# Altium PCB DoserController (2).PcbDoc
Units mm, origin at the board's own origin, x right, y up, seen from the top; angles counter-clockwise.
Board outline 46 x 30 mm, 2 copper layers (Top Layer, Bottom Layer); 40 components, 28 nets, 147 pads, 34 vias.
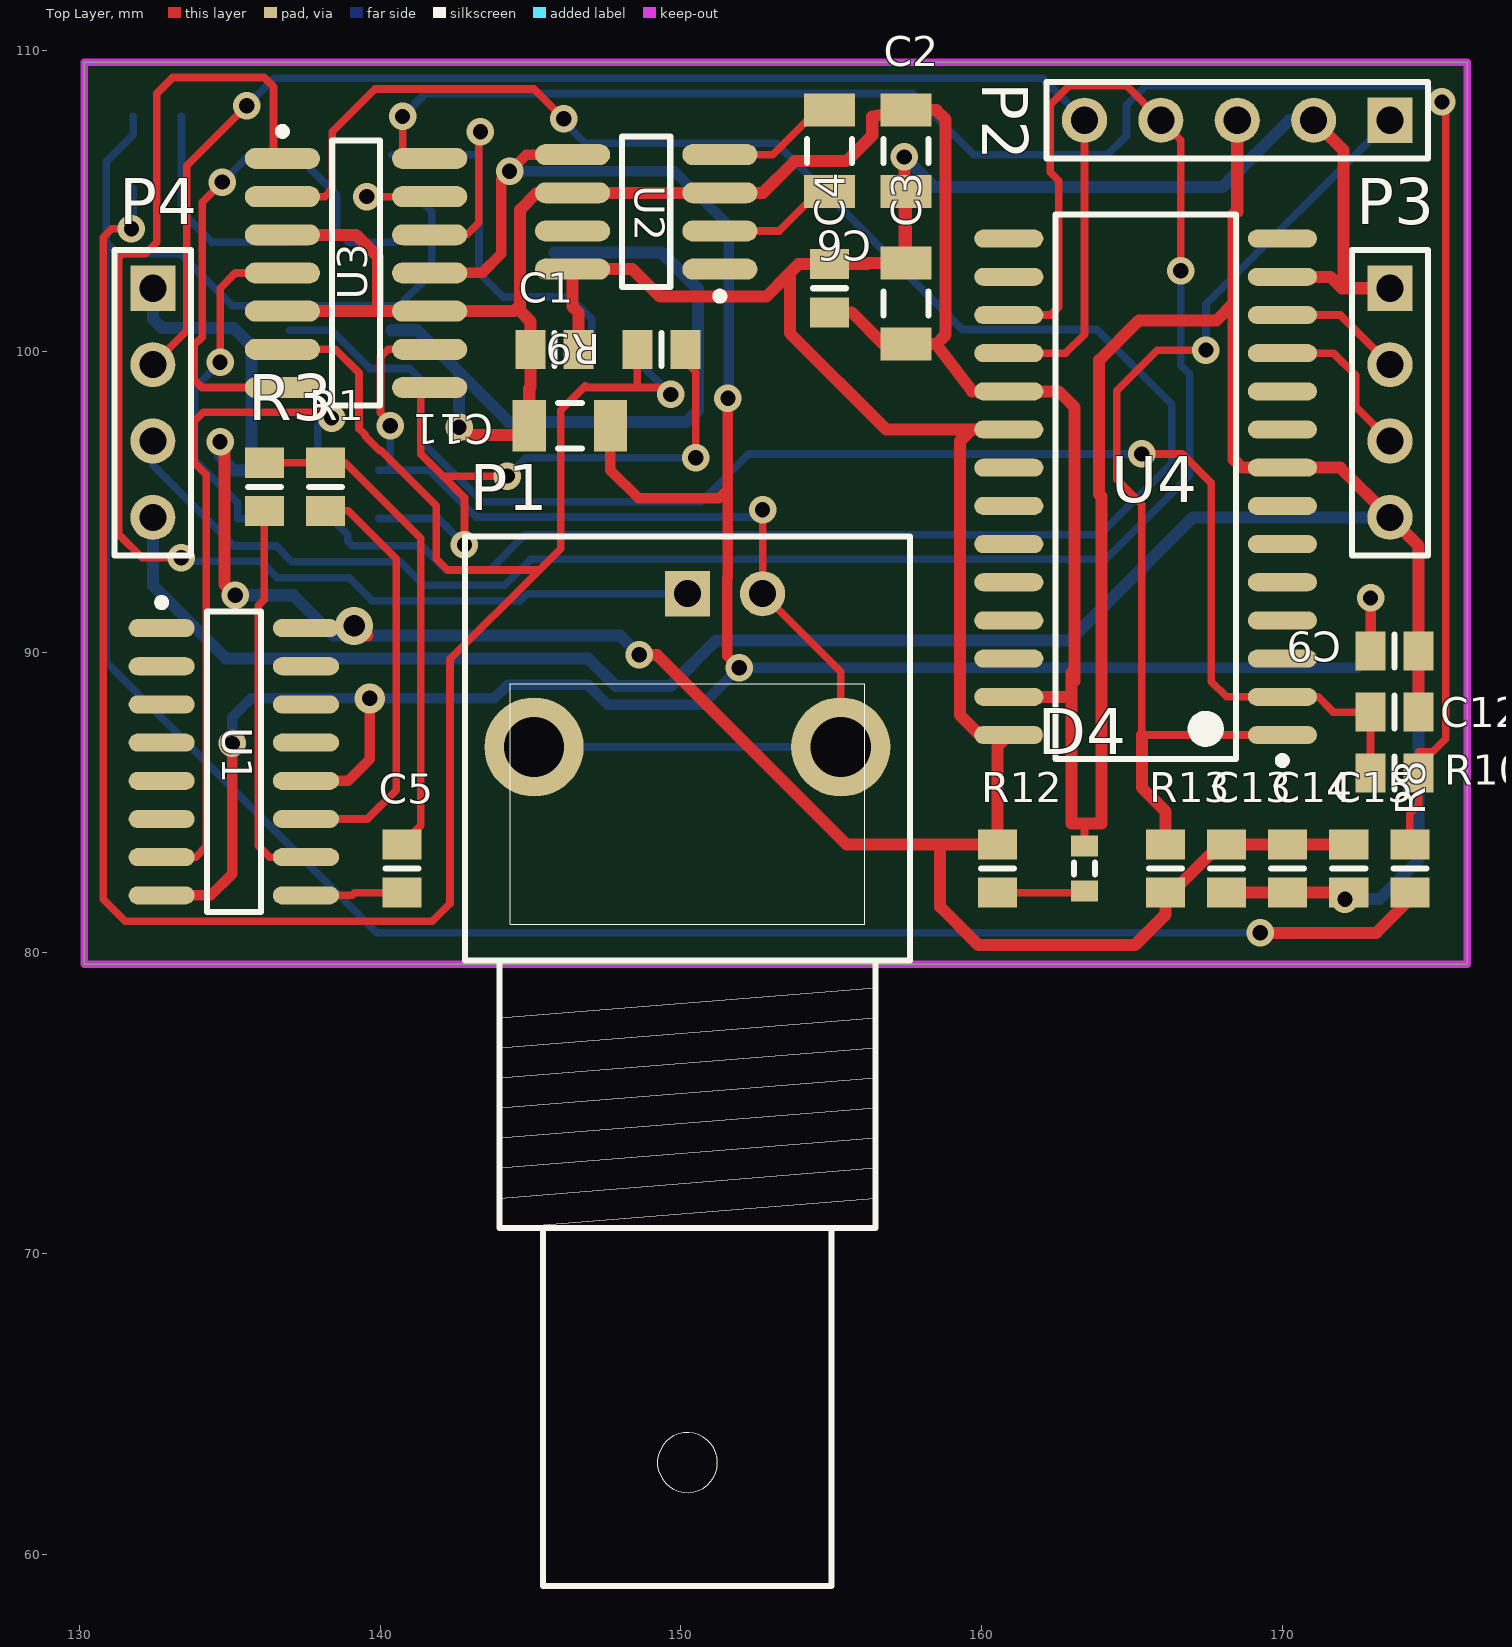
[diagram p0: Top Layer view]
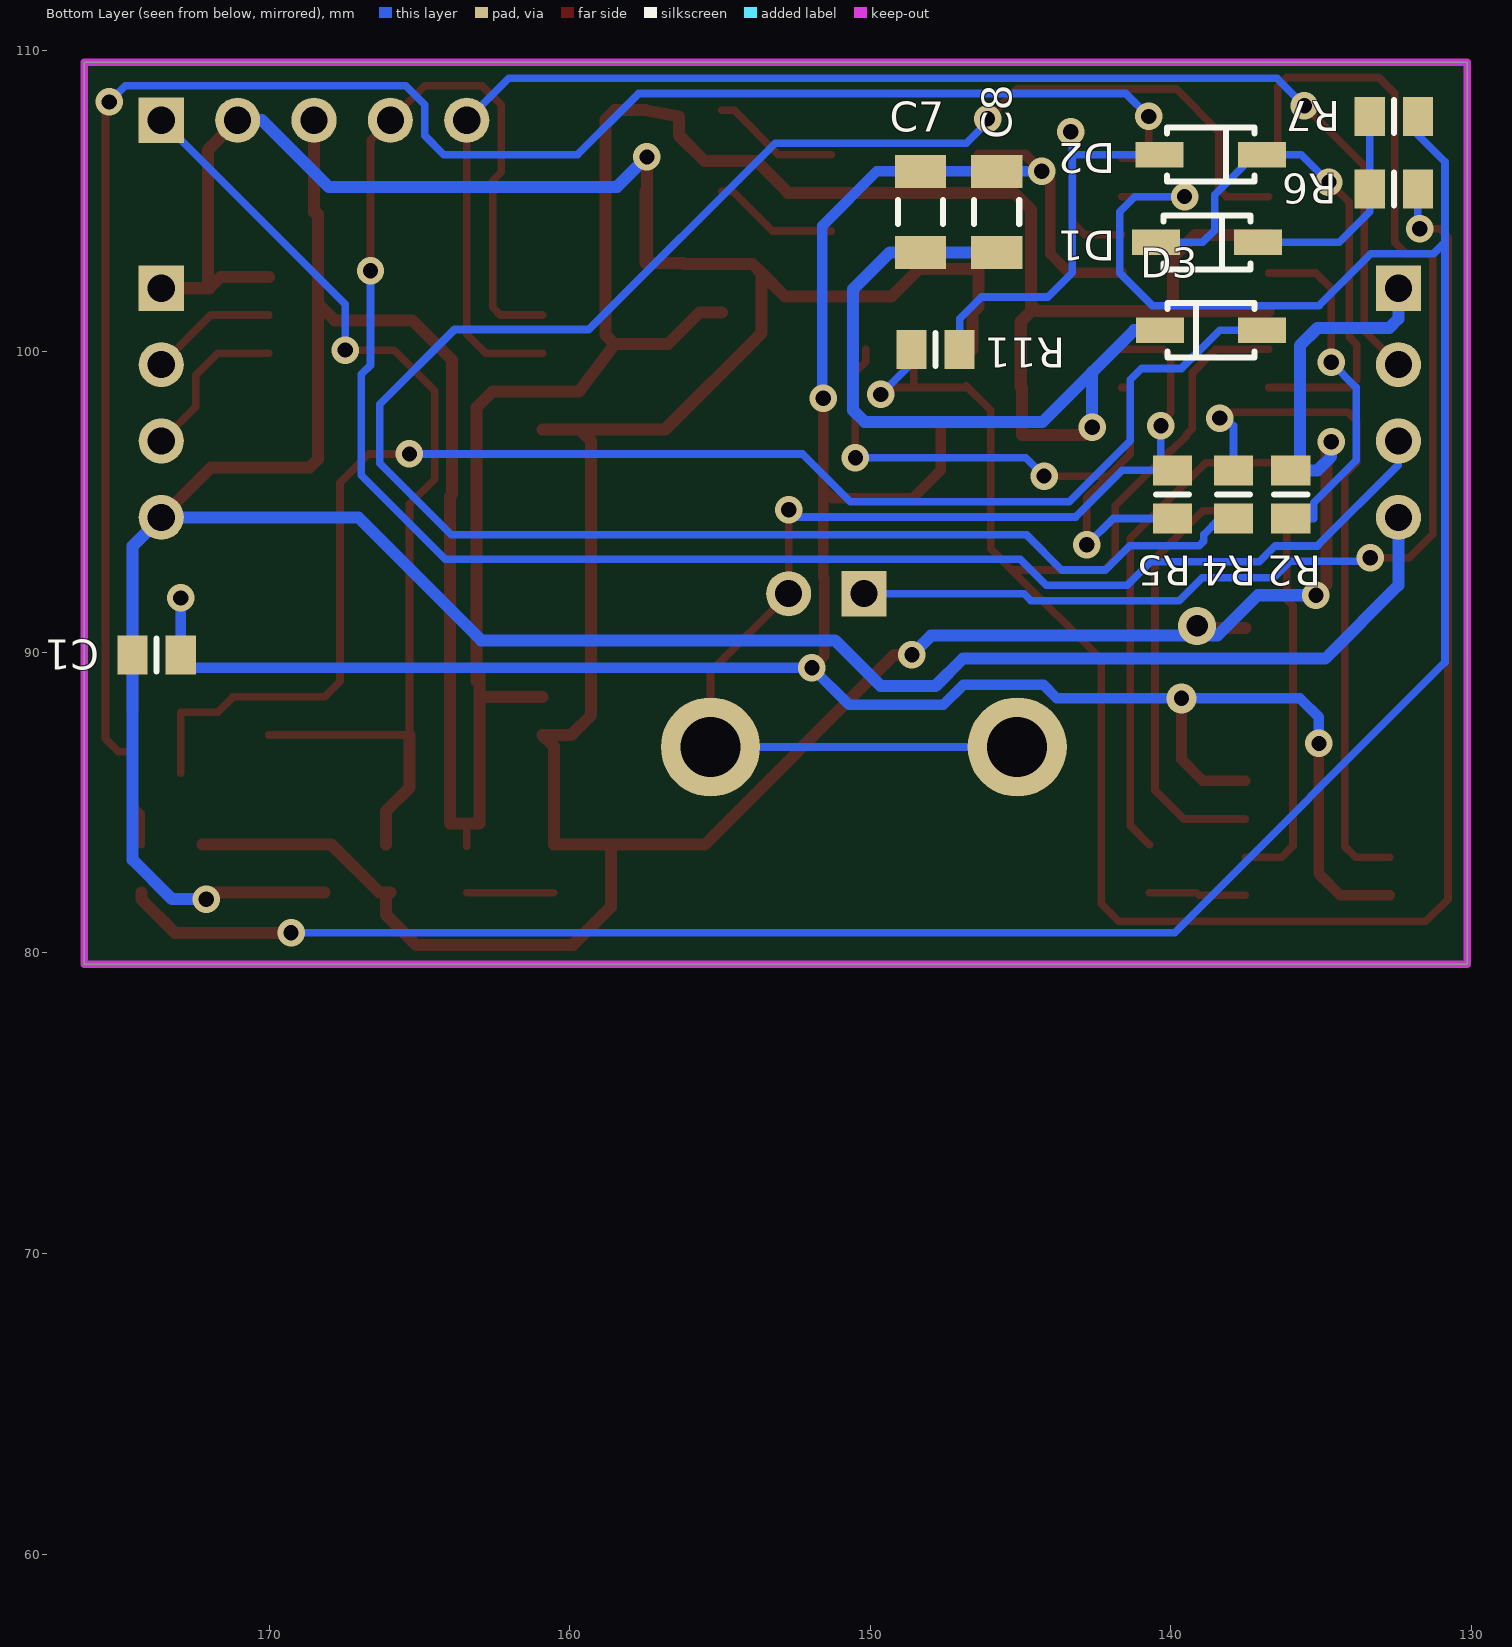
[diagram p1: Bottom Layer view, seen from below]

## Layer stack, top to bottom
Top Layer: signal copper 0.0356
Dielectric: dielectric 0.32, FR-4, Dk 4.8
Bottom Layer: signal copper 0.0356

## Board outline
130.149,109.629 176.149,109.629 176.149,79.629 130.149,79.629

## Design rules (kind name [scope] priority, off if disabled: settings)
Clearance Clearance_Board_Keepout [OnLayer('KeepOutLayer')] p1: gap=0.508
Clearance Minimum_pad_component_clearcance [(InPadClass('All Pads') AND InComponentClass('All Components')) vs (InPadClass('All Pads') AND InComponentClass('All Components'))] p2: gap=0.178
Clearance Clearance_DiffPairRouting [(IsTrack AND InDifferentialPairClass('All Differential Pairs')) vs (IsTrack AND InDifferentialPairClass('All Differential Pairs'))] p3: gap=0.203
Clearance Clearance_Via_Pad [(IsVia) vs (IsPad)] p4: gap=0.381
Clearance Clearance_Via_Via [(IsVia) vs (IsVia)] p5: gap=0.381
Clearance Clearance_wara_Default [All] p6: gap=0.254
Clearance [All] p7: gap=0.254
PolygonConnect [All] p1: connectstyle=Relief reliefconductorwidth=0.254 reliefentries=4 polygonreliefangle="90 Angle"
RoomDefinition Sheet1 [InComponentClass('Sheet1')] p1: confinementstyle=ConfineIn formatcopy=TRUE lockcomponents=FALSE outline 130.149,79.629 176.149,79.629 176.149,109.629 130.149,109.629
RoomDefinition ECCircuit [InComponentClass('ECCircuit')] p2: confinementstyle=ConfineIn formatcopy=TRUE lockcomponents=FALSE outline 176.149,79.629 176.149,109.629 130.149,109.629 130.149,79.629
RoutingVias [All] p1: holewidth=0.508 width=0.914 viastyle="Through Hole" minholewidth=0.508 minwidth=0.914 maxholewidth=0.711 maxwidth=1.27
SilkscreenOverComponentPads [All] p1: minsilkscreentomaskgap=0.254
SolderMaskExpansion [All] p1: expansion=0.102
Width +5isoec [InNet('+5VISOEC')] p1: maxlimit=2 minlimit=0.3 preferedwidth=0.4 minimp=50.000000 maximp=50.000000 favimp=50.000000
Width -5isoec [InNet('-5VISOEC')] p2: maxlimit=2 minlimit=0.35 preferedwidth=0.4 minimp=50.000000 maximp=50.000000 favimp=50.000000
Width GND2 [InNet('GND2')] p3: maxlimit=5 minlimit=0.254 preferedwidth=0.4 minimp=50.000000 maximp=50.000000 favimp=50.000000
27 further rules are at their usual default settings.

## Classes and differential pairs
component class Sheet1: C13 C14 C15 D4 P2 P3 P4 R12 R13 U4
component class ECCircuit: C1 C2 C3 C4 C5 C6 C7 C8 C9 C10 C11 C12 D1 D2 D3 P1 R1 R2 R3 R4 R5 R6 R7 R8 R9 R10 R11 R? U1 U2 U3

## Components (designator, comment, footprint, x,y, rotation, side; value= is the part's Value field where it differs from the comment)
C1 "Cap" RESC2012L 145.796,100.076 r180 top
C2 "Cap Pol1" CAPC3216L 157.48,106.68 r90 top
C3 "Cap Pol1" CAPC3216L 157.48,101.6 r270 top
C4 "Cap" RESC2012L 154.94,102.108 r270 top
C5 "Cap" RESC2012L 140.716,82.804 r270 top
C6 "Cap Pol1" CAPC3216L 154.94,106.68 r90 top
C7 "Cap Pol1" CAPC3216L 148.336,104.648 r90 bottom
C8 "Cap Pol1" CAPC3216L 145.796,104.648 r90 bottom
C9 "Cap" RESC2012L 173.736,90.043 r180 top
C10 "Cap" RESC2012L 173.736,89.916 r180 bottom
C11 "Cap Pol1" CAPC3216L 146.304,97.536 r0 top
C12 "Cap" RESC2012L 173.736,88.011 r0 top
C13 "Cap" RESC2012L 168.148,82.804 r90 top
C14 "Cap" RESC2012L 170.18,82.804 r90 top
C15 "Cap" RESC2012L 172.212,82.804 r90 top
D1 "Diode 1N4148" SOD123/X.85 138.803,103.632 r0 bottom
D2 "Diode 1N4148" SOD123/X.85 138.676,106.553 r0 bottom
D3 "Diode 1N5819" SOD123/X.85 138.668,100.711 r180 bottom
D4 "LED2" RESC1608L 163.423,82.804 r90 top
P1 "BNC" "BNC_RA CON" 150.215,91.948 r90 top
P2 "Header 5" HDR1X5 173.583,107.696 r180 top
P3 "Header 4" HDR1X4 173.583,102.108 r270 top
P4 "Header 4" HDR1X4 132.435,102.108 r270 top
R1 "Res1" RESC2012L 138.176,95.504 r270 top
R2 "Res1" RESC2012L 136.017,95.25 r90 bottom
R3 "Res1" RESC2012L 136.144,95.504 r270 top
R4 "Res1" RESC2012L 137.922,95.25 r270 bottom
R5 "Res1" RESC2012L 139.954,95.25 r270 bottom
R6 "Res1" RESC2012L 132.588,105.41 r0 bottom
R7 "Res1" RESC2012L 132.588,107.823 r180 bottom
R8 "Res1" RESC2012L 174.244,82.804 r90 top
R9 "Res1" RESC2012L 149.352,100.076 r180 top
R10 "Res1" RESC2012L 173.736,85.979 r180 top
R11 "Res1" RESC2012L 147.828,100.076 r180 bottom
R12 "Res1" RESC2012L 160.528,82.804 r90 top
R13 "Res Semi" RESC2012L 166.116,82.804 r270 top
U1 "CD4060BCM" M16A_N 135.128,86.36 r0 top
U2 "ICL7660S" SOIC127P600-8M 148.844,104.648 r180 top
U3 "TL084BCJ" NSO14_M 139.192,102.616 r0 top
U4 "DSPIC30F2020-30I/SO" SOIC-SO28_N 165.455,95.504 r180 top

## Footprints (in the part's own frame and the unit in brackets; to place one, negate y for a bottom-side part, rotate by r counter-clockwise, add the part's x,y. Pads: shape width x height; smd on the part's side, far side on the other; paste and mask are expansions set on the pad)
"BNC_RA CON" [mm] "Connector; BNC Elbow"
  rect 1.5x1.5 hole 0.9: 1(0,0)
  round 3.3 hole 2: 2(-5.1,-5.1) 2(-5.1,5.1)
  round 1.5 hole 0.9: 2(0,-2.5)
  silkscreen extent -33,-7.4 1.9,7.4
CAPC3216L [mm] "Chip Capacitor, Body 3.2x1.6mm, IPC High Density"
  rect 1.1x1.7 smd: 1(-1.35,0) 2(1.35,0)
  silkscreen extent -0.4,-0.75 0.4,0.75, body extent -1.7,-0.9 1.7,0.9, height 1.3
HDR1X4 [mm] "Connector; Header; 4 Position"
  rect 1.5x1.5 hole 0.9: 1(0,0)
  round 1.5 hole 0.9: 2(2.54,0) 3(5.08,0) 4(7.62,0)
  silkscreen extent -1.27,-1.27 8.89,1.27
HDR1X5 [mm] "Connector; Header; 5 Position"
  rect 1.5x1.5 hole 0.9: 1(0,0)
  round 1.5 hole 0.9: 2(2.54,0) 3(5.08,0) 4(7.62,0) 5(10.16,0)
  silkscreen extent -1.27,-1.27 11.43,1.27
M16A_N [mm] "SOIC, 16-Leads, Body 9.9x3.9mm, Pitch 1.27mm, IPC Medium Density"
  oval 2.2x0.6 smd: 1(-2.4,4.445) 2(-2.4,3.175) 3(-2.4,1.905) 4(-2.4,0.635) 5(-2.4,-0.635) 6(-2.4,-1.905) 7(-2.4,-3.175) 8(-2.4,-4.445) 9(2.4,-4.445) 10(2.4,-3.175) 11(2.4,-1.905) 12(2.4,-0.635) 13(2.4,0.635) 14(2.4,1.905) 15(2.4,3.175) 16(2.4,4.445)
  silkscreen extent -2.52,-5 0.9,5.42, body extent -2,-5 2,5, height 1.75
NSO14_M [mm] "SOIC, 14-Leads, Body 8.7x3.9mm, Pitch 1.27mm, IPC Low Density"
  oval 2.5x0.7 smd: 1(-2.45,3.81) 2(-2.45,2.54) 3(-2.45,1.27) 4(-2.45,0) 5(-2.45,-1.27) 6(-2.45,-2.54) 7(-2.45,-3.81) 8(2.45,-3.81) 9(2.45,-2.54) 10(2.45,-1.27) 11(2.45,0) 12(2.45,1.27) 13(2.45,2.54) 14(2.45,3.81)
  silkscreen extent -2.57,-4.4 0.8,4.83, body extent -2,-4.38 2,4.38, height 1.75
RESC1608L [mm] "Chip Resistor, Body 1.6x0.8mm, IPC High Density"
  rect 0.7x0.9 smd: 1(-0.75,0) 2(0.75,0)
  silkscreen extent -0.2,-0.35 0.2,0.35, body extent -0.85,-0.48 0.85,0.48, height 0.9
RESC2012L [mm] "Chip Resistor, Body 2.0x1.3mm, IPC High Density"
  rect 1x1.3 smd: 1(-0.8,0) 2(0.8,0)
  silkscreen extent 0,-0.55 0,0.55, body extent -1.07,-0.7 1.07,0.7, height 2.54
SOD123/X.85 [mm] "SOD-123; 2 Leads; Body 2.7 x 1.6 mm, (LxW)"
  rect 1.6x0.85 smd: 1(-1.7,0) 2(1.7,0)
  silkscreen extent -1.45,-0.9 1.45,0.9
SOIC127P600-8M [mm] "SOIC, 8-Leads, Body 4.9x3.9mm, Pitch 1.27mm, IPC Low Density"
  oval 2.5x0.7 smd: 1(-2.45,1.905) 2(-2.45,0.635) 3(-2.45,-0.635) 4(-2.45,-1.905) 5(2.45,-1.905) 6(2.45,-0.635) 7(2.45,0.635) 8(2.45,1.905)
  silkscreen extent -2.58,-2.5 0.8,2.93, body extent -2,-2.5 2,2.5, height 1.75
SOIC-SO28_N [mm] "SOIC, 28-Leads, Body 17.9x7.5mm, Pitch 1.27mm, IPC Medium Density"
  oval 2.3x0.6 smd: 1(-4.55,8.255) 2(-4.55,6.985) 3(-4.55,5.715) 4(-4.55,4.445) 5(-4.55,3.175) 6(-4.55,1.905) 7(-4.55,0.635) 8(-4.55,-0.635) 9(-4.55,-1.905) 10(-4.55,-3.175) 11(-4.55,-4.445) 12(-4.55,-5.715) 13(-4.55,-6.985) 14(-4.55,-8.255) 15(4.55,-8.255) 16(4.55,-6.985) 17(4.55,-5.715) 18(4.55,-4.445) 19(4.55,-3.175) 20(4.55,-1.905) 21(4.55,-0.635) 22(4.55,0.635) 23(4.55,1.905) 24(4.55,3.175) 25(4.55,4.445) 26(4.55,5.715) 27(4.55,6.985) 28(4.55,8.255)
  silkscreen extent -4.67,-9.05 3,9.23, body extent -3.8,-9.06 3.8,9.06, height 2.65

## Part data
C1 C4 C5 C9 C10 C12 C13 C14 C15: "Capacitor"
C2 C3 C6 C7 C8 C11: "Polarized Capacitor (Radial)"
D1 D2: "High Conductance Fast Diode"
D3: library part "Diode 1N4001", "1 Amp General Purpose Rectifier"
D4: "Typical RED, GREEN, YELLOW, AMBER GaAs LED"
P1: "BNC Elbow Connector"
P2: "Header, 5-Pin"
P3 P4: "Header, 4-Pin"
R1 R2 R3 R4 R5 R6 R7 R8 R9 R10 R11 R12: "Resistor"
R13: "Semiconductor Resistor"
U1: "14-Stage Ripple Carry Binary Counter"
U3: "JFET-Input Operational Amplifier"
U4: "High-Performance 16-bit Digital Signal Controller with Switch Mode Power Supply, 12 KB Flash, 512 Byte SRAM, 28-Pin SOIC, Industrial Temperature"

## Via types
v1: diameter 0.914, hole 0.508, Top Layer to Bottom Layer, 32 vias
v2: diameter 1.27, hole 0.711, Top Layer to Bottom Layer, 1 vias
v3: diameter 1, hole 0.508, Top Layer to Bottom Layer, 1 vias

## Nets (pads, with @x,y where several pads share a name; then routed paths per layer and width w, separated by ;. In a path a pad name is that pad's centre, name@x,y a point inside that pad or via, vN(x,y) a via of type N, cw(c..) or ccw(c..) an arc to the next point about the centre after c; other vN are vias at no path point)
+5VISOEC: C1.1 C2.1 C3.1 C4.1 C13.2 C14.2 C15.2 P2.2 P3.1 P4.1 R2.2 R12.2 R13.2 U1.16 U2.8 U4.13 U4.20 U4.28 | length 140.5
  Top Layer w0.4: v1(134.671,97.003) 134.823,97.003 134.823,92.253 v1(135.179,91.897) ; U1.16 139.319,90.805 139.573,90.551 139.457,90.551 v2(139.13,90.878) ; C1.1 146.596,101.295 146.394,101.497 U2.8 148.387,102.743 149.301,101.829 152.832,101.829 153.619,102.616 ; v1(148.615,89.916) 149.2,89.916 155.512,83.604 158.623,83.604 ; v1(157.429,106.477) 157.429,105.33 C3.1@157.429,102.95 ; C2.1 C3.1 ; R13.2@165.964,82.004 R13.2 ; P2.2 172.034,106.705 172.034,102.108 ; C15.2 C14.2 C13.2 167.919,83.604 166.319,82.004 R13.2 ; P3.1 171.983,102.108 171.602,102.489 171.348,102.489 ; 153.619,102.616 153.911,102.908 ; 153.619,102.616 153.619,100.617 156.827,97.409 159.664,97.409 ; 153.619,102.616 153.911,102.908 ; 153.911,102.908 C4.1 156.185,102.908 156.227,102.95 C3.1@157.429,102.95 ; C3.1@157.429,102.95 C3.1 ; C3.1@157.429,102.95 C3.1 ; 158.623,83.604 158.623,81.534 159.893,80.264 165.1,80.264 166.116,81.28 R13.2 ; 158.623,83.604 R12.2 160.528,86.872 U4.28 159.944,87.249 159.283,87.909 159.283,97.028 159.664,97.409 ; 159.664,97.409 U4.20 159.664,97.409 ; 171.348,102.489 U4.13 171.348,102.489
  Bottom Layer w0.4: P4.1 132.435,101.092 132.74,100.787 135.128,100.787 135.712,100.203 R2.2@135.712,96.05 ; v1(134.671,97.003) 134.671,96.507 135.128,96.05 R2.2@135.712,96.05 ; v1(135.179,91.897) 137.109,91.897 138.455,90.551 147.98,90.551 v1(148.615,89.916) ; v1(157.429,106.477) 158.43,105.476 168.011,105.476 170.231,107.696 P2.2 ; R2.2@135.712,96.05 R2.2 R2.2@135.712,96.05
-5VISOEC: C7.2 C8.2 C9.2 C10.2 C11.2 U1.8 U1.12 U2.5 U3.11 | length 92.2
  Top Layer w0.254: v3@139.649,88.189 v3(139.649,88.468)
  Top Layer w0.35: U1.8 134.366,81.915 135.077,82.626 v1(135.077,86.97) ; U1.12 138.938,85.725 139.649,86.436 v3(139.649,88.468) ; U3.11 143.383,102.616 144.021,103.254 144.021,105.721 v1(144.297,105.998) 144.852,106.553 U2.5 ; C11.2 147.654,96.059 148.59,95.123 151.257,95.123 151.562,95.428 ; v1(151.562,98.45) 151.562,95.428 ; v1(151.943,89.484) 151.536,89.891 151.536,92.462 151.562,92.488 151.562,95.428 ; C9.2 v1(172.936,91.808)
  Bottom Layer w0.254: v1(151.562,98.45) v1@151.591,98.48
  Bottom Layer w0.35: v1(135.077,86.97) 135.077,87.833 135.712,88.468 v3(139.649,88.468) 143.795,88.468 144.254,88.927 146.892,88.927 147.571,88.249 150.707,88.249 v1(151.943,89.484) 172.504,89.484 C10.2 v1(172.936,91.808) ; v1(144.297,105.998) C8.2 C7.2 149.78,105.998 151.591,104.187 v1@151.591,98.48
GND2: C1.2 C2.2 C3.2 C4.2 C7.1 C8.1 C9.1 C10.1 C11.1 C12.2 C13.1 C14.1 C15.1 D3.1 D4.2 P2.3 P3.4 P4.4 U2.3 U2.6 U3.3 U3.5 U3.10 U4.8 U4.19 U4.27 | length 208.4
  Top Layer w0.254: D4.2 163.423,84.304
  Top Layer w0.4: U3.5 139.929,101.346 ; U3.3 139.192,103.886 139.929,103.149 139.929,101.346 ; v1(142.621,97.485) 142.875,97.231 144.954,97.231 C11.1 144.954,98.781 144.996,98.823 C1.2 144.996,101.003 144.65,101.349 144.65,101.552 ; C4.2 155.677,101.308 156.735,100.25 C3.2 158.496,100.25 ; U4.27 162.992,88.519 ; 163.093,89.052 163.093,89.408 ; C13.1 C14.1 C15.1 ; P2.3 168.503,104.698 ; C12.2 C9.1 174.536,93.535 P3.4 171.932,96.139 U4.8 168.656,96.139 168.377,96.418 168.377,101.6 ; 139.929,101.346 U3.10 142.672,101.346 144.443,101.346 144.65,101.552 ; 144.65,101.552 144.65,104.724 145.209,105.283 U2.6 U2.3 152.73,105.283 153.781,106.334 155.508,106.334 156.362,107.188 156.362,107.823 C2.2 158.496,108.03 158.801,107.725 158.801,100.555 158.496,100.25 ; 158.496,100.25 159.686,98.679 U4.19 162.56,98.679 163.093,98.146 163.093,89.408 ; 162.992,88.519 162.992,89.306 163.093,89.408 ; 162.992,88.519 162.992,84.304 163.423,84.304 163.982,84.304 163.982,95.177 163.909,95.25 163.909,99.714 165.237,101.041 167.818,101.041 168.377,101.6 ; 168.377,101.6 168.377,104.521 ; 168.377,104.521 168.503,104.647 168.503,104.698 ; 168.377,104.521 168.377,104.572 168.503,104.698
  Bottom Layer w0.4: P4.4 132.435,92.225 134.871,89.789 146.92,89.789 147.831,88.878 149.654,88.878 151.174,90.399 162.941,90.399 167.03,94.488 P3.4 174.536,93.535 C10.1 174.536,83.096 173.228,81.788 v1(172.085,81.788) ; D3.1 141.224,100.711 142.621,99.314 ; v1(142.621,97.485) 142.621,99.314 ; C8.1 C7.1 149.352,103.298 150.568,102.082 150.568,98.044 150.19,97.666 144.269,97.666 142.621,99.314
NetC5_1: C5.1 R1.1 R3.1 | length 16.7
  Top Layer w0.254: R3.1 R1.1 138.838,96.304 141.351,93.791 141.351,84.239 C5.1
NetC5_2: C5.2 U1.9 | length 3.2
  Top Layer w0.254: U1.9 139.065,81.915 139.154,82.004 C5.2
NetC6_1: C6.1 U2.2 | length 4.2
  Top Layer w0.254: U2.2 153.264,104.013 154.581,105.33 C6.1
NetC6_2: C6.2 U2.4 | length 4.3
  Top Layer w0.254: U2.4 153.055,106.553 154.532,108.03 C6.2
NetC12_1: C12.1 D3.2 R10.2 U4.2 | length 49.6
  Top Layer w0.254: v1(165.329,96.596) 166.675,96.596 167.64,95.631 167.64,89.027 168.148,88.519 U4.2 171.196,88.519 171.704,88.011 C12.1 R10.2
  Bottom Layer w0.254: D3.2 138.379,100.711 139.649,99.441 140.97,99.441 141.351,99.06 141.351,97.043 143.385,95.01 150.67,95.01 152.256,96.596 v1(165.329,96.596)
NetD1_1: D1.1 R6.2 R7.1 | length 7.3
  Bottom Layer w0.254: R7.1 R6.2 133.388,104.648 134.404,103.632 D1.1
NetD1_2: D1.2 D2.1 U3.7 | length 18
  Top Layer w0.254: v1(134.747,105.639) 134.074,104.966 134.074,100.487 133.816,100.229 133.816,99.06 134.07,98.806 U3.7
  Bottom Layer w0.254: v1(134.747,105.639) 135.661,106.553 D2.1 137.211,106.553 138.542,105.221 138.542,104.04 138.95,103.632 D1.2
NetD2_2: D2.2 R11.2 U3.12 | length 17.9
  Top Layer w0.254: U3.12 142.875,103.886 143.273,104.284 143.273,107.256 v1(143.332,107.315)
  Bottom Layer w0.254: D2.2 143.281,106.553 ; v1(143.332,107.315) 143.281,107.264 143.281,106.553 ; R11.2 147.028,101.092 146.304,101.816 144.092,101.816 143.281,102.627 143.281,106.553
NetD4_1: D4.1 R12.1 | length 2.9
  Top Layer w0.254: R12.1 D4.1@163.423,82.004
NetP1_1: P1.1 U3.1 | length 42.5
  Top Layer w0.254: v1(133.375,93.142) 132.08,93.142 131.293,93.929 131.293,103.124 131.42,103.251 132.182,103.251 132.563,103.632 132.563,108.585 133.096,109.118 136.144,109.118 136.449,108.814 136.449,106.426 U3.1
  Bottom Layer w0.254: v1(133.375,93.142) 133.488,93.029 136.028,93.029 136.576,92.481 138.963,92.481 139.725,91.719 144.653,91.719 144.882,91.948 P1.1
NetP1_2: P1.2 R5.1 U3.9 | length 38.4
  Top Layer w0.254: v1(140.335,97.536) 140.335,97.638 140.005,97.968 140.005,99.822 140.259,100.076 U3.9 ; v1(152.715,94.742) 152.715,91.948 155.315,89.348 P1.2@155.315,86.848
  Bottom Layer w0.254: R5.1 R5.1@140.335,96.05 ; v1@140.335,97.638 R5.1@140.335,96.05 ; P1.2@145.115,86.848 P1.2@155.315,86.848 ; v1(152.715,94.742) 152.475,94.502 143.173,94.502 141.624,96.05 R5.1@140.335,96.05
NetP2_1: P2.1 R13.1 U4.1 | length 35.2
  Top Layer w0.254: 165.329,86.258 165.329,94.92 164.49,95.758 164.49,98.704 165.837,100.051 v1(167.462,100.051) ; 165.329,87.249 U4.1
  Top Layer w0.4: 165.329,87.249 165.329,85.496 166.116,84.709 R13.1
  Bottom Layer w0.254: v1(167.462,100.051) 167.462,101.575 P2.1
NetP2_4: P2.4 P4.3 U4.17 | length 63.7
  Top Layer w0.254: U4.17 162.306,101.219 162.56,101.473 162.56,105.689 162.281,105.969 162.281,108.204 162.916,108.839 164.82,108.839 P2.4 166.624,107.035 v1(166.624,102.692)
  Bottom Layer w0.254: P4.3 132.435,96.23 135.128,93.537 136.536,93.537 137.058,93.015 140.665,93.015 141.453,92.227 144.145,92.227 145.009,93.091 164.135,93.091 166.929,95.885 166.929,99.245 166.624,99.55 v1(166.624,102.692)
NetP2_5: P2.5 P4.2 U4.18 | length 48.6
  Top Layer w0.254: P4.2 133.566,100.699 133.566,106.185 v1(135.56,108.179) ; U4.18 162.788,99.949 163.423,100.584 P2.5
  Bottom Layer w0.254: v1(135.56,108.179) 136.474,109.093 162.026,109.093 P2.5
NetP3_2: P3.2 U4.12 | length 4.3
  Top Layer w0.254: U4.12 171.932,101.219 P3.2
NetP3_3: P3.3 U4.11 | length 5.4
  Top Layer w0.254: U4.11 171.704,99.949 172.441,99.212 172.441,98.17 P3.3
NetR1_2: R1.2 U1.11 | length 14.1
  Top Layer w0.254: U1.11 139.573,84.455 140.53,85.412 140.53,93.112 138.938,94.704 R1.2
NetR2_1: R2.1 U3.4 | length 11.6
  Top Layer w0.254: v1(134.671,99.644) 134.671,102.108 135.179,102.616 U3.4
  Bottom Layer w0.254: v1(134.671,99.644) 133.833,98.806 133.833,96.393 135.255,94.971 135.255,94.45 R2.1
NetR3_2: R3.2 U1.10 | length 13
  Top Layer w0.254: R3.2 136.144,91.745 135.941,91.542 135.941,83.566 136.322,83.185 U1.10
NetR4_1: R4.1 U1.7 | length 22.8
  Top Layer w0.254: U1.7 133.858,83.185 134.214,83.541 134.214,95.908 133.818,96.304 133.818,97.686 134.112,97.98 138.189,97.98 v1(138.379,97.79)
  Bottom Layer w0.254: R4.1 137.922,97.536 138.176,97.79 v1(138.379,97.79)
NetR4_2: R4.2 U3.2 | length 69.2
  Top Layer w0.254: U3.2 138.151,105.156 138.405,105.41 138.405,107.315 139.827,108.737 145.11,108.737 v1(146.101,107.747)
  Bottom Layer w0.254: R4.2 138.379,94.45 138.913,93.917 138.913,93.701 139.065,93.548 141.376,93.548 142.189,92.735 143.637,92.735 144.805,93.904 163.932,93.904 166.319,96.291 166.319,98.247 163.83,100.736 159.36,100.736 153.167,106.929 146.812,106.929 146.101,107.64 v1(146.101,107.747)
NetR5_2: R5.2 R9.1 U3.8 | length 21.7
  Top Layer w0.254: U3.8 141.351,98.806 141.351,97.485 141.351,96.596 142.087,95.86 ; v1(142.799,93.574) 142.799,95.148 142.087,95.86 ; v1(144.221,95.86) 142.087,95.86 ; R9.1 150.152,99.67 150.495,99.327 v1(150.495,96.469)
  Bottom Layer w0.254: R5.2 141.922,94.45 v1(142.799,93.574) ; v1(144.221,95.86) 144.831,96.469 v1(150.495,96.469)
NetR6_1: R6.1 R9.2 R11.1 U3.6 | length 75.5
  Top Layer w0.254: v1(131.724,104.089) 131.064,104.089 130.785,103.81 130.785,81.788 131.521,81.051 141.732,81.051 142.316,81.636 142.316,89.764 145.288,92.735 ; U3.6 138.506,100.076 139.294,99.289 139.294,97.434 139.497,97.231 139.497,97.189 139.988,96.698 140.03,96.698 141.859,94.869 141.859,93.116 142.24,92.735 145.288,92.735 ; 148.552,98.806 148.552,99.682 R9.2 ; v1(149.657,98.577) 149.428,98.806 146.863,98.806 146.812,98.857 145.999,98.044 145.999,93.447 145.288,92.735
  Bottom Layer w0.254: v1(131.724,104.089) 131.788,104.153 R6.1 ; R11.1 148.628,99.606 v1(149.657,98.577)
NetR7_2: R7.2 R8.1 U3.13 | length 84.9
  Top Layer w0.254: v1(139.548,105.156) U3.13
  Top Layer w0.4: v1(169.266,80.67) 173.126,80.67 174.244,81.788 R8.1
  Bottom Layer w0.254: R7.2 131.788,107.213 130.886,106.312 130.886,103.632 ; v1(139.548,105.156) 141.199,105.156 141.707,104.648 141.707,102.616 140.614,101.524 135.077,101.524 133.35,103.251 131.267,103.251 130.886,103.632 ; v1(169.266,80.67) 139.878,80.67 130.886,89.662 130.886,103.632
NetR8_2: R8.2 R10.1 U3.14 | length 65.3
  Top Layer w0.254: v1(140.741,107.823) 140.741,106.426 U3.14 ; R8.2 174.244,84.633 174.536,84.925 R10.1 174.536,86.69 175.006,86.69 175.438,87.122 175.438,108.179 v1(175.311,108.306)
  Bottom Layer w0.254: v1(140.741,107.823) 141.503,108.585 157.709,108.585 159.741,106.553 164.186,106.553 164.821,107.188 164.821,108.204 165.456,108.839 174.777,108.839 v1(175.311,108.306)
pads on no net: U1.1 U1.2 U1.3 U1.4 U1.5 U1.6 U1.13 U1.14 U1.15 U2.1 U2.7 U4.3 U4.4 U4.5 U4.6 U4.7 U4.9 U4.10 U4.14 U4.15 U4.16 U4.21 U4.22 U4.23 U4.24 U4.25 U4.26

## Keep-outs
Keep-Out Layer:
  the board outline again, w0.254